# Altium PCB PCB1.PcbDoc (part 1 of 3)
Units mm, origin at the board's own origin, x right, y up, seen from the top; angles counter-clockwise.
Board outline 80 x 55 mm, 4 copper layers (Top Layer, Inner Layer 1, Inner Layer 2, Bottom Layer 1), stack 0.603 mm thick; 136 components, 94 nets, 499 pads, 245 vias.
Unrouted connection lines stored in the file: 1.
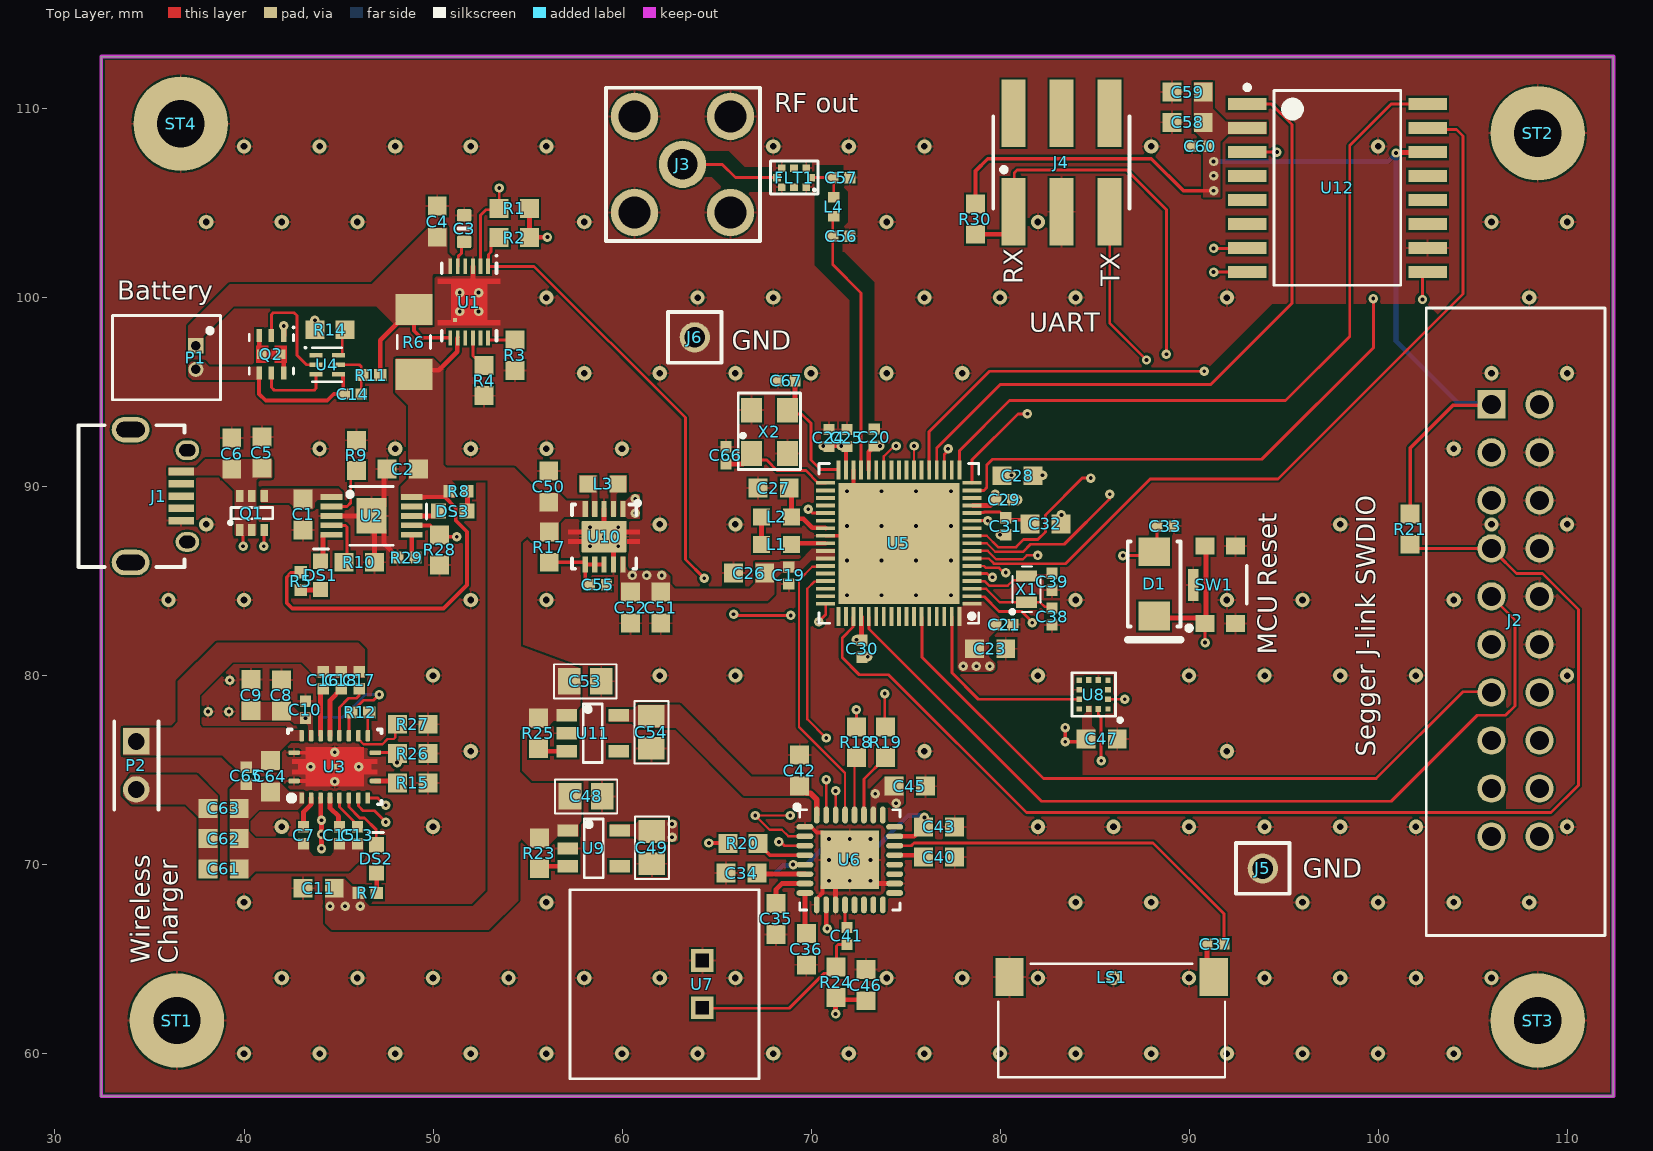
[diagram p0: Top Layer view]
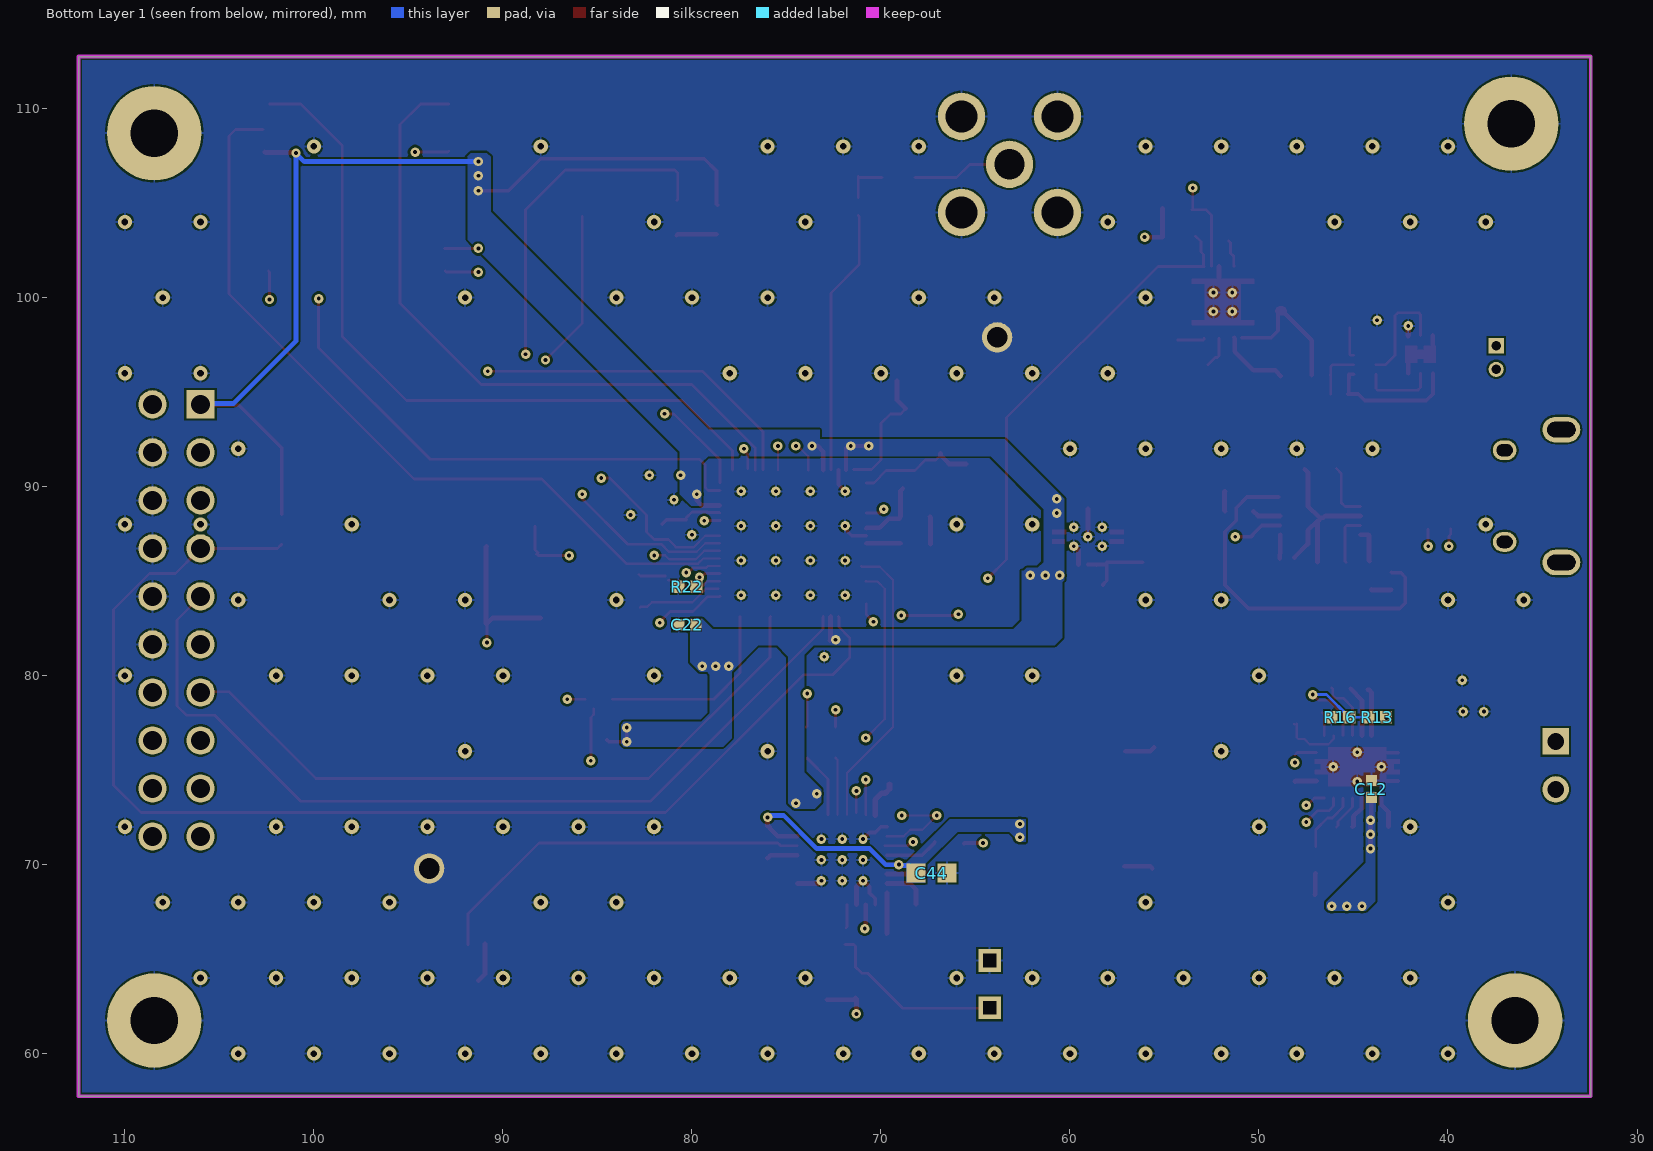
[diagram p1: Bottom Layer 1 view, seen from below]
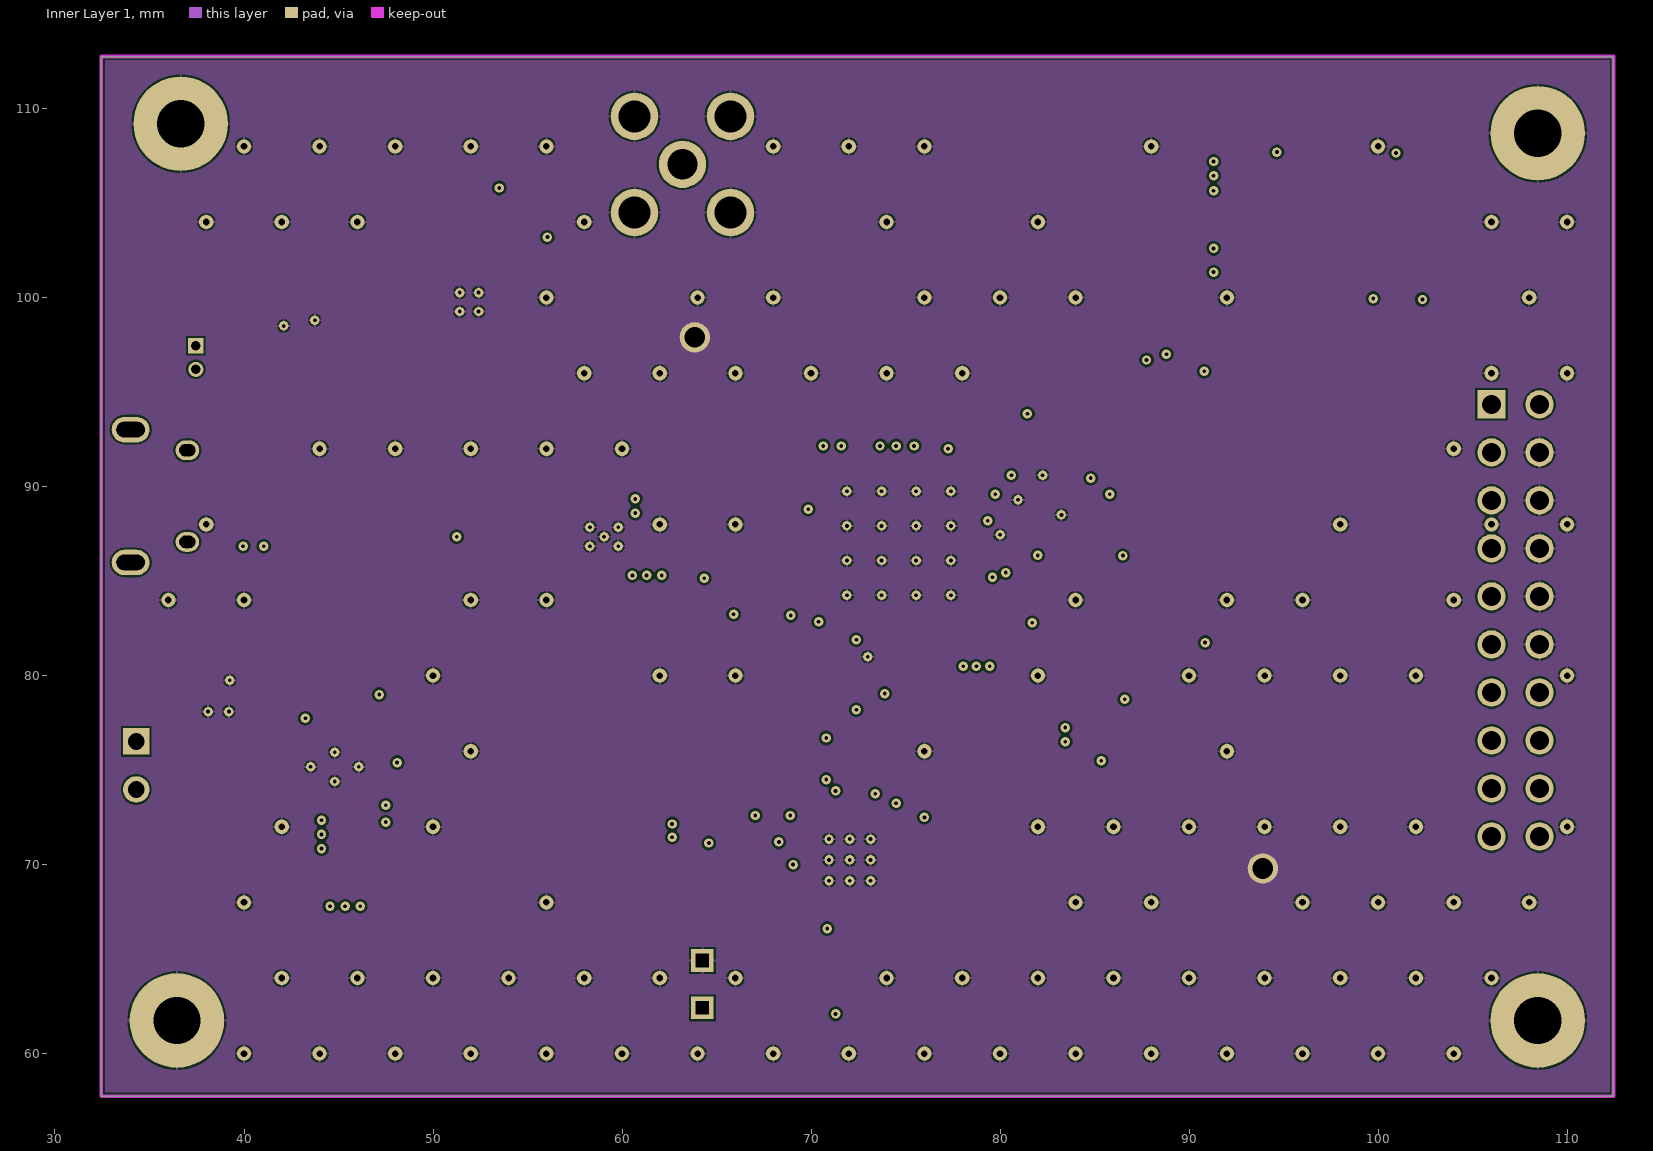
[diagram p2: Inner Layer 1]
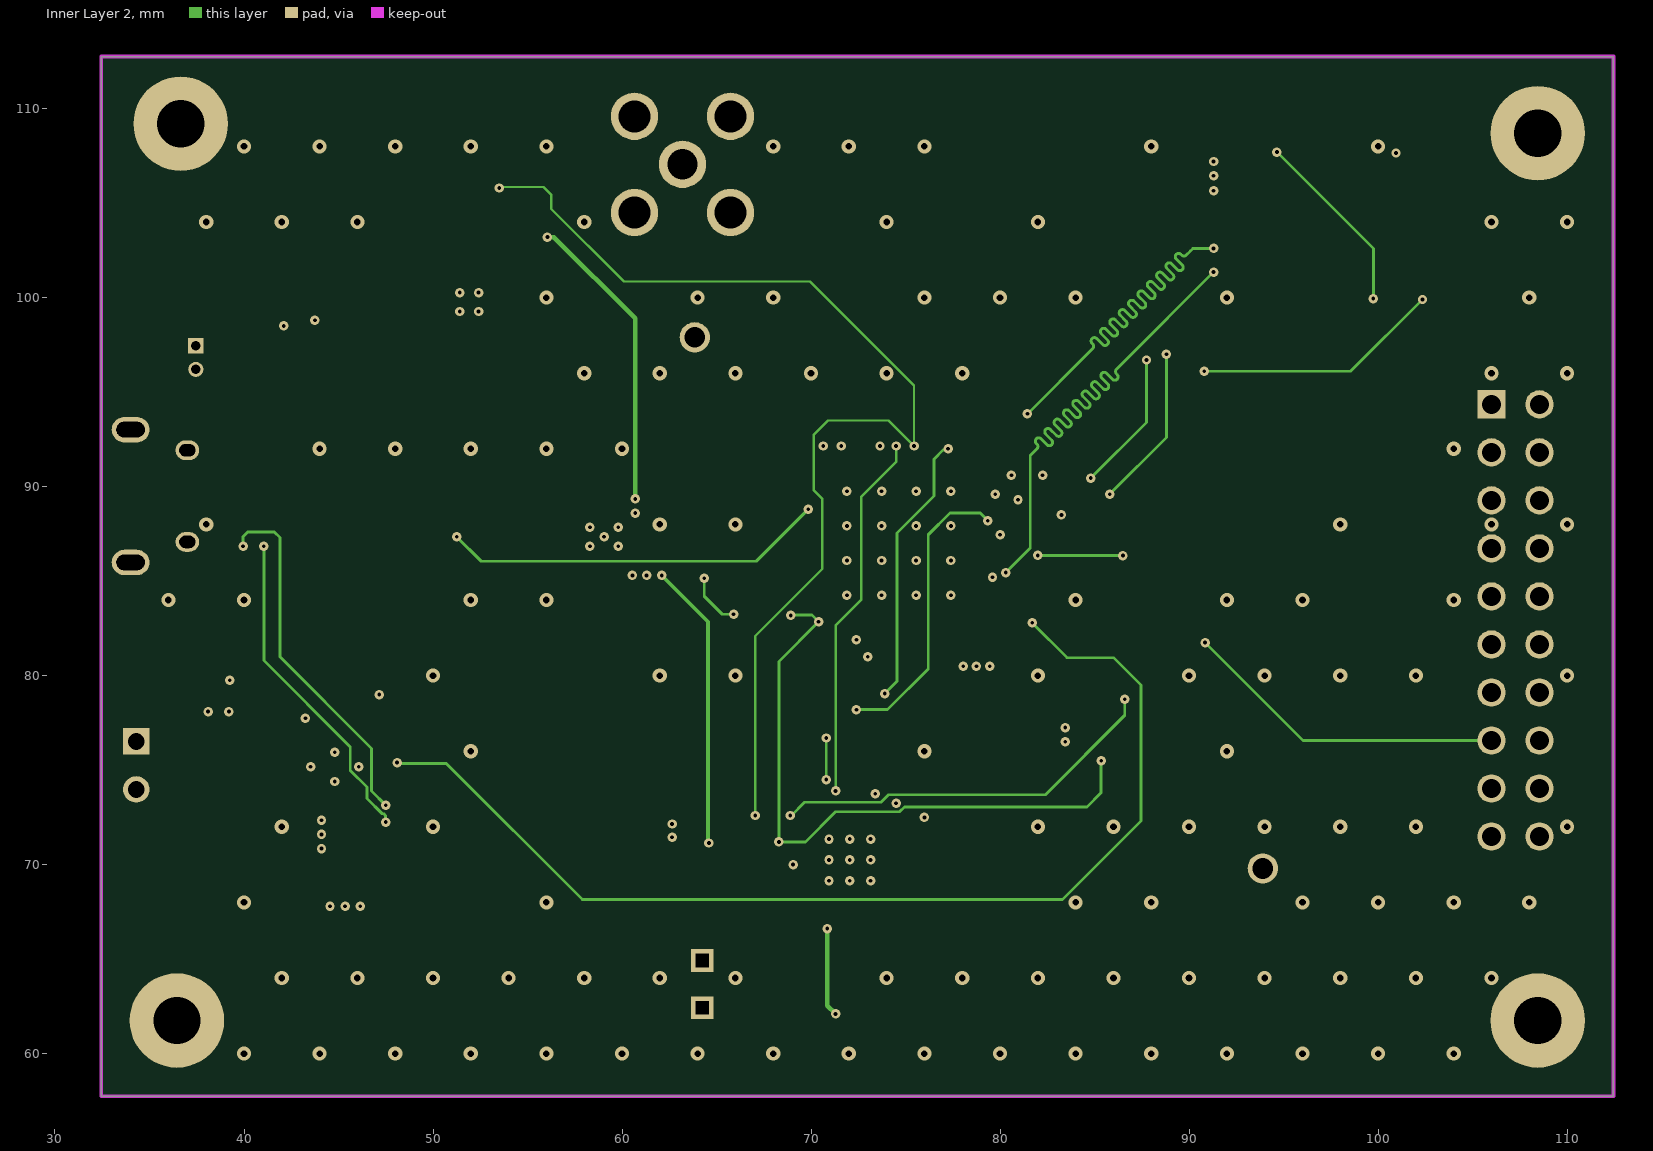
[diagram p3: Inner Layer 2]

## Layer stack, top to bottom
Top Solder: solder mask 0.0102, Solder Resist, Dk 3.5
Top Layer: signal copper 0.035
Dielectric 2: prepreg 0.0711, PP-006, Dk 4.1
Inner Layer 1: signal copper 0.0356
Dielectric 1: dielectric 0.32, FR-4, Dk 4.8
Inner Layer 2: signal copper 0.0356
Dielectric 3: prepreg 0.0711, PP-006, Dk 4.1
Bottom Layer 1: signal copper 0.035
Bottom Solder: solder mask 0.0102, Solder Resist, Dk 3.5

## Board outline
32.45,57.75 32.45,112.75 112.45,112.75 112.45,57.75

## Design rules (kind name [scope] priority, off if disabled: settings)
BoardOutlineClearance [All] p1: gap=0.2 ignorepadtopadclearanceinfootprint=FALSE
Clearance [All] p1: gap=0.1 ignorepadtopadclearanceinfootprint=FALSE except(0.125: Arc-Via Track-Via SMDPad-Via THPad-Via Via-Via Via-Fill Via-Poly Via-Region Via-Text; 0.25: Arc-Hole Track-Hole SMDPad-Hole THPad-Hole Via-Hole Fill-Hole Poly-Hole Region-Hole Text-Hole)
ComponentClearance [All] p1: gap=0 collisioncheckmode=3 verticalgap=2540 showdistances=TRUE checkcomponentboundary=TRUE
DiffPairsRouting 100R [InDifferentialPair('DRAM_SDQS0') or InDifferentialPair('DRAM_SDQS1')  or InDifferentialPair('DRAM_SDCLK0')] p1: maxlimit=0.25 minlimit=0.09 mostfreqgap=0.125 toplayer_minwidth=0.09 toplayer_maxwidth=0.125 toplayer_prefwidth=0.1 midlayer1_minwidth=0.09 midlayer1_maxwidth=0.125 midlayer1_prefwidth=0.1 midlayer2_minwidth=0.09 midlayer2_maxwidth=0.125 midlayer2_prefwidth=0.1 bottomlayer_minwidth=0.09 bottomlayer_maxwidth=0.125 bottomlayer_prefwidth=0.1 maxuncoupledlength=20
DiffPairsRouting 90R [InDifferentialPair('USB_D')] p2: maxlimit=0.15 minlimit=0.125 mostfreqgap=0.125 toplayer_minwidth=0.125 toplayer_maxwidth=0.15 toplayer_prefwidth=0.125 midlayer1_minwidth=0.125 midlayer1_maxwidth=0.15 midlayer1_prefwidth=0.125 midlayer2_minwidth=0.125 midlayer2_maxwidth=0.15 midlayer2_prefwidth=0.125 bottomlayer_minwidth=0.125 bottomlayer_maxwidth=0.15 bottomlayer_prefwidth=0.125 maxuncoupledlength=12.7
Height [All] p1: minheight=0 maxheight=1816.048 prefheight=12.7
HoleSize [All] p1: absolutevalues=TRUE maxlimit=6.3 minlimit=0.2 maxpercent=80.000 minpercent=20.000
HoleToHoleClearance [All] p1: gap=0.25 allowstackedmicrovias=FALSE
MatchedLengths QSPI [InNetClass('QSPI')] p1: tolerance=10 checknetsindiffpair=FALSE checkdiffpairvsdiffpair=TRUE checkxsignals=TRUE checkothers=TRUE
MinimumAnnularRing [All] p1: minimumring=0.076
MinimumSolderMaskSliver [All] p1: minsoldermaskwidth=0
PlaneClearance [All] p1: clearance=0.1
PlaneConnect PlaneConnectPowerPads [InPadClass('PowerPads')] p1: planeconnectstyle=Direct reliefexpansion=0.508 reliefentries=4 reliefconductorwidth=0.254 reliefairgap=0.254
PlaneConnect [All] p2: planeconnectstyle=Direct reliefexpansion=0.3 reliefentries=4 reliefconductorwidth=0.1 reliefairgap=0.1
PolygonConnect GND_POLY [InNet('GND')] p1: connectstyle=Relief reliefconductorwidth=0.125 reliefentries=4 polygonreliefangle="90 Angle" airgapwidth=0.1
PolygonConnect PolygonConnect_1 [All] p2: connectstyle=Direct reliefconductorwidth=0.254 reliefentries=4 polygonreliefangle="90 Angle" airgapwidth=0.254
PolygonConnect PolygonConnectPowerPads [All vs (InPadClass('PowerPads'))] p3: connectstyle=Direct reliefconductorwidth=0.254 reliefentries=4 polygonreliefangle="90 Angle" airgapwidth=0.254
RoomDefinition Sheet2 [InComponentClass('Sheet2')] p1: confinementstyle=ConfineOut formatcopy=TRUE lockcomponents=FALSE outline 119.25,132.55 148.3,103.5 196.2,103.5 213.35,120.65 177.35,156.65 175.25,156.65
RoomDefinition Sheet1 [InComponentClass('Sheet1')] p2: confinementstyle=ConfineOut formatcopy=TRUE lockcomponents=FALSE outline 129,144 129,132.8 166.65,95.15 208.35,136.85 224.6,136.85 190.5,170.95
RoutingTopology RoutingTopology_DDRAddressAndControls [InNetClass('DDR_AddressAndControls')] p1: topology=Daisy_Simple
RoutingTopology [All] p2: topology=Shortest
RoutingVias [All] p1: holewidth=0.2 width=0.5 viastyle="Through Hole" minholewidth=0.2 minwidth=0.45 maxholewidth=6.3 maxwidth=6.55
SilkToSilkClearance [All] p1: silktosilkclearance=0
SilkToSolderMaskClearance [IsPad] p1: minsilkscreentomaskgap=0.102 clearancetoexposedcopper=TRUE
SolderMaskExpansion [All] p1: expansion=0.075 istentingtop=FALSE
Width Width_1 [TouchesRoom('RoomDefinition') and (not OnTopLayer)] p1: maxlimit=0.65 minlimit=0.1 preferedwidth=0.125 toplayer_prefwidth=0.1 midlayer1_minwidth=0.125 midlayer2_minwidth=0.125 bottomlayer_prefwidth=0.1 minimp=50.000000 maximp=50.000000 favimp=50.000000
Width 50R [(InNetClass('QSPI') or InNetClass('DDR_DB0') or InNetClass('DDR_DB1')) and not(InAnyDifferentialPair) or InNetClass('ENET') or InNetClass('SD')  or InNet('BL_RF')] p2: maxlimit=0.15 minlimit=0.1 preferedwidth=0.15 midlayer1_minwidth=0.125 midlayer2_minwidth=0.125 minimp=50.000000 maximp=50.000000 favimp=50.000000
Width [All] p3: maxlimit=0.65 minlimit=0.1 preferedwidth=0.125 midlayer1_minwidth=0.125 midlayer2_minwidth=0.125 minimp=50.000000 maximp=50.000000 favimp=50.000000
19 further rules are at their usual default settings.

## Classes and differential pairs
net class QSPI: QSPI_IO0 QSPI_IO1 QSPI_IO2 QSPI_IO3 QSPI_NCS QSPI_SCK
component class Sheet2: C33 C34 C35 C36 C37 C38 C39 C40 C41 C42 C43 C44 C45 C46 C47 C48 C49 C53 C54 C56 C57 C58 C59 C60 C66 C67 D1 FLT1 J2 J3 J4 J5 J6 L4 LS1 R18 R19 R20 R21 R22 R23 R24 R25 R30 SW1 U5 U6 U7 U8 U9 U11 U12 X1 X2
component class sheet1: C1 C2 C3 C4 C5 C6 C7 C8 C9 C10 C11 C12 C13 C14 C15 C16 C17 C18 C19 C20 C21 C22 C23 C24 C25 C26 C27 C28 C29 C30 C31 C32 C50 C51 C52 C55 C61 C62 C63 C64 C65 DS1 DS2 DS3 J1 L1 L2 L3 P1 P2 Q1 Q2 R1 R2 R3 R4 R5 R6 R7 R8 R9 R10 R11 R12 R13 R14 R15 R16 R17 R26 R27 R28 R29 ST1 ST2 ST3 ST4 U1 U2 U3 U4 U10

## Components (designator, comment, footprint, x,y, rotation, side; value= is the part's Value field where it differs from the comment)
C1 "C0603C105K3PACTU" 0603-SMD-CAP 43.125,88.5 r270 top value=1uF
C2 "C0603C105K3PACTU" 0603-SMD-CAP 48.375,90.925 r180 top value=1uF
C3 "Capacitor 470nF +/-20% 25V 0603" CAPC0603(1608)100_L 51.65,103.65 r90 top value=470nF
C4 "C0603C105K3PACTU" 0603-SMD-CAP 50.225,104.046 r90 top value=1uF
C5 "0603ZD106KAT2A" 0603-SMD-CAP 40.95,91.775 r270 top value=10µF
C6 "C0603C105K3PACTU" 0603-SMD-CAP 39.35,91.775 r90 top value=1uF
C7 "CL05B103KB5NNNC" 0402-SMD-CAP 43.15,71.55 r90 top value=10nF
C8 "0603ZD106KAT2A" 0603-SMD-CAP 41.975,78.925 r270 top value=10µF
C9 "0603ZD106KAT2A" 0603-SMD-CAP 40.374,78.95 r270 top value=10µF
C10 "EMF105B7104MVHF" 0402-SMD-CAP 43.25,78.2 r90 top value=100nF
C11 "C0603C105K3PACTU" 0603-SMD-CAP 43.925,68.75 r180 top value=1uF
C12 "EMF105B7104MVHF" 0402-SMD-CAP 44.05,74 r90 bottom value=100nF
C13 "CC0402KRX7R8BB223" 0402-SMD-CAP 46.001,71.55 r90 top value=22nF
C14 "EMF105B7104MVHF" 0402-SMD-CAP 45.75,94.9 r180 top value=100nF
C15 "C1005X5R1E474K050BB" 0402-SMD-CAP 45.051,71.55 r90 top value=470nF
C16 "CL05B103KB5NNNC" 0402-SMD-CAP 44.2,79.75 r270 top value=10nF
C17 "CC0402KRX7R8BB223" 0402-SMD-CAP 46.101,79.75 r270 top value=22nF
C18 "C1005X5R1E474K050BB" 0402-SMD-CAP 45.151,79.75 r270 top value=470nF
C19 "EMF105B7104MVHF" 0402-SMD-CAP 68.825,85.3 r270 top value=100nF
C20 "EMF105B7104MVHF" 0402-SMD-CAP 73.35,92.6 r90 top value=100nF
C21 "EMF105B7104MVHF" 0402-SMD-CAP 80.225,82.7 r0 top value=100nF
C22 "EMF105B7104MVHF" 0402-SMD-CAP 80.25,82.7 r0 bottom value=100nF
C23 "C0603C475K9PACTU" 0603-SMD-CAP 79.5,81.424 r0 top value=4.7uF
C24 "EMF105B7104MVHF" 0402-SMD-CAP 70.95,92.575 r90 top value=100nF
C25 "04025A101JAT2A" 0402-SMD-CAP 71.9,92.575 r90 top value=100pF
C26 "C0603C475K9PACTU" 0603-SMD-CAP 66.7,85.425 r180 top value=4.7uF
C27 "C0603C475K9PACTU" 0603-SMD-CAP 68,89.926 r180 top value=4.7uF
C28 "C0603C105K3PACTU" 0603-SMD-CAP 80.95,90.575 r0 top value=1uF
C29 "CC0402KRX7R7BB103" 0402-SMD-CAP 80.225,89.3 r0 top value=10nF
C30 "EMF105B7104MVHF" 0402-SMD-CAP 72.7,81.425 r270 top value=100nF
C31 "EMF105B7104MVHF" 0402-SMD-CAP 80.3,87.9 r270 top value=100nF
C32 "C0603C105K3PACTU" 0603-SMD-CAP 82.425,88.025 r0 top value=1uF
C33 "EMF105B7104MVHF" 0402-SMD-CAP 88.75,87.91 r0 top value=100nF
C34 "GRM188R71A225KE15D" 0603-SMD-CAP 66.3,69.55 r180 top value=2.2uF
C35 "C0603C105K3PACTU" 0603-SMD-CAP 68.15,67.1 r270 top value=1uF
C36 "C0603C105K3PACTU" 0603-SMD-CAP 69.75,65.5 r270 top value=1uF
C37 "GRM155R71C224KA12D" 0402-SMD-CAP 91.4,65.8 r180 top value=220nF
C38 "04025A7R0CAT2A" 0402-SMD-CAP 82.75,83.125 r90 top value=7pF
C39 "04025A7R0CAT2A" 0402-SMD-CAP 82.75,84.975 r90 top value=7pF
C40 "C0603C105K3PACTU" 0603-SMD-CAP 76.8,70.4 r0 top value=1uF
C41 "GRM155R71C224KA12D" 0402-SMD-CAP 71.9,66.225 r90 top value=220nF
C42 "C0603C105K3PACTU" 0603-SMD-CAP 69.4,75 r90 top value=1uF
C43 "C0603C105K3PACTU" 0603-SMD-CAP 76.8,72 r0 top value=1uF
C44 "C0603C105K3PACTU" 0603-SMD-CAP 67.3,69.549 r180 bottom value=1uF
C45 "C0603C105K3PACTU" 0603-SMD-CAP 75.25,74.15 r0 top value=1uF
C46 "C0603C105K3PACTU" 0603-SMD-CAP 72.901,63.649 r90 top value=1uF
C47 "C0603C105K3PACTU" 0603-SMD-CAP 85.4,76.65 r0 top value=1uF
C48 "C0805C106K8PACTU" 0805-SMD-CAP 58.1,73.609 r0 top value=10uF
C49 "C0805C106K8PACTU" 0805-SMD-CAP 61.579,70.9 r270 top value=10uF
C50 "0603ZD106KAT2A" 0603-SMD-CAP 56.125,89.975 r270 top value=10µF
C51 "0603ZD106KAT2A" 0603-SMD-CAP 62.05,83.625 r90 top value=10µF
C52 "0603ZD106KAT2A" 0603-SMD-CAP 60.45,83.625 r90 top value=10µF
C53 "C0805C106K8PACTU" 0805-SMD-CAP 58.05,79.7 r0 top value=10uF
C54 "C0805C106K8PACTU" 0805-SMD-CAP 61.55,77 r270 top value=10uF
C55 "EMF105B7104MVHF" 0402-SMD-CAP 58.725,84.8 r0 top value=100nF
C56 "GJM1555C1HR80BB01D" 0402-SMD-CAP 71.6,103.25 r0 top value=0.8pF
C57 "GJM1555C1HR30WB01D" 0402-SMD-CAP 71.6,106.35 r0 top value=0.3pF
C58 "CC0603KRX7R9BB104" 0603-SMD-CAP 89.9,109.275 r180 top value=100nF
C59 "CC0603KRX7R9BB104" 0603-SMD-CAP 89.9,110.876 r180 top value=100nF
C60 "04025A101JAT2A" 0402-SMD-CAP 90.6,108 r180 top value=100pF
C61 "06035C683KAT2A" 0603-SMD-CAP 38.95,69.775 r0 top value=68nF
C62 "06035C683KAT2A" 0603-SMD-CAP 38.95,71.375 r0 top value=68nF
C63 "06035G473ZAT2A" 0603-SMD-CAP 38.95,72.975 r0 top value=47nF
C64 "06031C182JAT2A" 0603-SMD-CAP 41.4,74.7 r90 top value=1.8nF
C65 "04025A101JAT2A" 0402-SMD-CAP 40.125,74.7 r90 top value=100pF
C66 "CGA2B2C0G1H080D050BA" 0402-SMD-CAP 65.5,91.651 r90 top value=8pF
C67 "CGA2B2C0G1H080D050BA" 0402-SMD-CAP 68.7,95.601 r180 top value=8pF
D1 "SS12-E3/61T" VISH-DO-214AC_V 88.154,84.85 r270 top
DS1 "LTST-C190GKT" LTST-C190GKT_V 44.049,85.303 r90 top
DS2 "LTST-C190KSKT" LTST-C190KSKT_V 47.001,70.3 r90 top
DS3 "LTST-C190KSKT" LTST-C190KSKT_V 51.047,88.7 r180 top
FLT1 "LFL212G45TC1A007" LFL212G45TC1A007-Footprint-1 69.1,106.35 r180 top
J1 "ZX62D-B-5P8" HIRO-ZX62D-B-5P8_V 35.5,89.5 r270 top
J2 "51033085" 51033085-Footprint-1 107.25,82.9 r90 top
J3 "142-0701-501" 142-0701-501-Footprint-1 63.2,107.05 r0 top
J4 "5-146130-2" TECO-5-146130-2_V 83.25,107.15 r0 top
J5 "61300111121" 61300111121 93.9,69.8 r0 top
J6 "61300111121" 61300111121 63.85,97.9 r0 top
L1 "B82496C3100J000" 0603-SMD-IND 68.175,86.95 r0 top value=10nH
L2 "CVH160808-2R2M" 0603-SMD-IND 68.175,88.4 r180 top value=2.2uH
L3 "B82496C3229A" 0603-SMD-IND 59,90.15 r0 top value=2.2nH
L4 "LQG15HS2N7S02D" 0402-SMD-IND 71.2,104.8 r90 top value=2.7nH
LS1 "CMR-12062S-67" CMR-12062S-67-Footprint-1 85.9,61.75 r180 top
P1 "53048-0210" PHOE-1803277_V 37.45,96.85 r270 top
P2 "5-146280-2" TECO-5-146280-2_V 34.3,75.25 r270 top
Q1 "SI1441EDH-T1-GE3" SOT23127P600-8N#1 40.418,88.6 r90 top
Q2 "CSD85301Q2" SON65P200X80_HS-7N 41.45,97 r270 top
R1 "ERJ-3EKF4701V" 0603-SMD-RES 54.3,104.721 r0 top value=4.7k
R2 "ERJ-3EKF4701V" 0603-SMD-RES 54.3,103.171 r0 top value=4.7k
R3 "CR0603-JW-105ELF" 0603-SMD-RES 54.336,96.95 r270 top value=1M
R4 "CR0603-JW-105ELF" 0603-SMD-RES 52.7,95.611 r270 top value=1M
R5 "ERJ-2RKF4220X" 0402_SMD_RES 42.999,85 r270 top value=422
R6 "WSLP1206R0200FEA" Chip2PinSM127P600-8N 48.985,97.65 r270 top value=20m
R7 "ERJ-2RKF4220X" 0402_SMD_RES 46.55,68.499 r180 top value=422
R8 "ERJ-2RKF4220X" 0402_SMD_RES 51.35,89.751 r180 top value=422
R9 "CRCW06031K10FKEA" 0603-SMD-RES 45.95,91.65 r270 top value=1.1k
R10 "ERJ-3EKF2401V" 0603-SMD-RES 46.1,86 r180 top value=2.4k
R11 "CRCW0402200RFKED" 0402_SMD_RES 46.735,95.9 r0 top value=200
R12 "ERJ-2RKF4220X" 0402_SMD_RES 46.15,78.05 r180 top value=422
R13 "CRCW040220K0FKED" 0402_SMD_RES 43.75,77.8 r180 bottom value=20k
R14 "CRCW060322K0FKEA" 0603-SMD-RES 44.55,98.3 r0 top value=22k
R15 "ERJ-3EKF2401V" 0603-SMD-RES 48.925,74.325 r180 top value=2.4k
R16 "CRCW0402200RFKED" 0402_SMD_RES 45.7,77.8 r180 bottom value=200
R17 "CRCW0603100RFKEA" 0603-SMD-RES 56.15,86.8 r90 top value=100
R18 "Jumper 0603" 0603-SMD-RES 72.4,76.475 r270 top value=0
R19 "Jumper 0603" 0603-SMD-RES 73.95,76.476 r90 top value=0
R20 "ERJ-3EKF4701V" 0603-SMD-RES 66.4,71.126 r180 top value=4.7k
R21 "Resistor 100k +/-1% 0603 100 mW" 0603-SMD-RES 101.7,87.75 r90 top value=100k
R22 "CRCW040210K0FKTD" 0402_SMD_RES 80.25,84.7 r180 bottom value=10k
R23 "Jumper 0603" 0603-SMD-RES 55.628,70.6 r270 top value=0
R24 "CRCW06032K20FKEA" 0603-SMD-RES 71.325,63.774 r270 top value=2.2k
R25 "Jumper 0603" 0603-SMD-RES 55.575,76.95 r270 top value=0
R26 "ERJ-3EKF4701V" 0603-SMD-RES 48.925,75.875 r180 top value=4.7k
R27 "CRCW060320K0FKEA" 0603-SMD-RES 48.925,77.425 r180 top value=20k
R28 "ERJ-3EKF4701V" 0603-SMD-RES 50.35,86.65 r90 top value=4.7k
R29 "CRCW040210K0FKTD" 0402_SMD_RES 48.6,86.25 r180 top value=10k
R30 "CRCW060322K0FKEA" 0603-SMD-RES 78.7,104.15 r270 top value=22k
ST1 "PTH-M2D5X5" PTH-M2D5X5 36.45,61.75 r0 top
ST2 "PTH-M2D5X5" PTH-M2D5X5 108.45,108.7 r0 top
ST3 "PTH-M2D5X5" PTH-M2D5X5 108.45,61.75 r0 top
ST4 "PTH-M2D5X5" PTH-M2D5X5 36.65,109.2 r0 top
SW1 "KMR231GLFS" FP-KMR231GLFS-MFG 91.65,84.8 r90 top
U1 "BQ27411DRZT-G1A" SON40P400X100_HS-13N 51.911,99.766 r270 top
U2 "BQ24092DGQT" TSSOP50P490X110_HS-11L 46.75,88.45 r0 top
U3 "BQ51051BRHLR" RHL0020A_V 44.8,75.175 r90 top
U4 "BQ29707DSER" SON50P150X80-6N 44.4,96.45 r0 top
U5 "STM32WB55RCV6" QFN40P800X800X100_HS-69N 74.65,87 r180 top
U6 "MAX9867ETJ+G3U" QFN50P500X500X80_HS-33N 72.05,70.25 r0 top
U7 "AOM-4544P-2-R" AOM-4544P-2-R-Footprint-1 62.25,63.675 r270 top
U8 "MC3413" "MC3413 -Footprint-1" 84.95,79 r90 top
U9 "TPS78418QDBVRQ1" SOT23127P600-8N#2 58.504,70.859 r0 top
U10 "TPS63001DRCR" DRC0010J_V 59.05,87.35 r270 top
U11 "TPS78418QDBVRQ1" SOT23127P600-8N#2 58.45,76.95 r0 top
U12 "S25FL128SDSMFV000" SOIC127P1030X265-16M 97.85,105.8 r0 top
X1 "ECS-.327-7-12-TR" ECS-.327-7-12-TR-Footprint-1 81.4,84.575 r90 top
X2 "ECS-320-8-33B-7KM-TR" ECS-320-8-33B-7KM-TR-Footprint-1 67.8,92.901 r90 top

## Footprints (in the part's own frame and the unit in brackets; to place one, negate y for a bottom-side part, rotate by r counter-clockwise, add the part's x,y. Pads: shape width x height; smd on the part's side, far side on the other; paste and mask are expansions set on the pad)
142-0701-501-Footprint-1 [mm]
  round 2.5 hole 1.6: 1(0,0)
  round 2.5 hole 1.7: 2(-2.54,2.54) 3(2.54,2.54) 4(2.54,-2.55) 5(-2.54,-2.55)
  silkscreen extent -4.05,-4.05 4.1,4.05
0402-SMD-CAP [mm] "Passive 0402 SMD footprint"
  rect 0.6x0.6 smd paste+0 mask+0: 1(-0.45,0) 2(0.45,0)
  body extent -0.8,-0.4 0.8,0.4, height 0.25
0402-SMD-IND [mm]
  rect 0.55x0.63 smd: 1(-0.5,0) 2(0.5,0)
  body extent -0.55,-0.25 0.55,0.26, height 0.51
0402_SMD_RES [mm] "SMD 0402 package resistor"
  rect 0.65x0.65 smd mask+0.06: 1(-0.475,0) 2(0.475,0)
  body extent -0.53,-0.27 0.53,0.28, height 0.34
0603-SMD-CAP [mm] "0402 package SMD passive footprint"
  rect 1x1 smd paste+0 mask+0.06: 1(-0.85,0) 2(0.8,0)
0603-SMD-IND [mm] "Chip Inductor, 2-Leads, Body 1,60x0,80mm, IPC High Density"
  rect 0.9x0.9 smd mask+0.06: 1(-0.79,0) 2(0.79,0)
  body extent -0.88,-0.48 0.87,0.48, height 0.95
0603-SMD-RES [mm]
  rect 1x1 smd mask+0.06: 1(-0.8,0) 2(0.8,0)
  body extent -0.77,-0.48 0.77,0.48, height 0.5
0805-SMD-CAP [mm] "SMD 0805 package capacitor"
  rect 1.2x1.4 smd mask+0.06: 1(-0.85,0) 2(0.85,0)
  silkscreen extent -1.65,-0.9 1.65,0.9, body extent -1.05,-0.63 1.05,0.63, height 1.26
51033085-Footprint-1 [mm]
  rect 1.5x1.5 hole 1: 1(11.45,1.25)
  round 1.5 hole 1: 2(11.45,-1.29) 3(8.91,1.25) 4(8.91,-1.29) 5(6.37,1.25) 6(6.37,-1.29) 7(3.83,1.25) 8(3.83,-1.29) 9(1.29,1.25) 10(1.29,-1.29) 11(-1.25,1.25) 12(-1.25,-1.29) 13(-3.79,1.25) 14(-3.79,-1.29) 15(-6.33,1.25) 16(-6.33,-1.29) 17(-8.87,1.25) 18(-8.87,-1.29) 19(-11.41,1.25) 20(-11.41,-1.29)
  silkscreen extent -16.65,-4.75 16.55,4.7
61300111121 [mm] "Pin Header, pitch 2.54 mm, THT, Vertical, single row, 1p"
  round 1.6 hole 1.1: 1(0,0)
  silkscreen extent -1.42,-1.35 1.42,1.35, body extent -1.27,-1.27 1.27,1.27, height 8.57
AOM-4544P-2-R-Footprint-1 [mm]
  rect 1.2x1.2 hole 0.7 square mask+0.1: 1(1.25,2) 2(-1.25,2)
  silkscreen extent -5,-5 5,5, body extent -4.85,-4.85 4.85,4.85, height 2.67
CAPC0603(1608)100_L [mm] "Chip Capacitor, Body 1.6x0.8mm, Height 1.0mm, IPC High Density"
  rrect25% 0.66x0.76 smd: 1(-0.7,0) 2(0.7,0)
  silkscreen extent 0,-0.3 0,0.3, body extent -0.8,-0.4 0.8,0.4, height 0.95
Chip2PinSM127P600-8N [mm] "1206-SMD-RES"
  rect 1.65x1.95 smd: 1(-1.725,0) 2(1.725,0)
  silkscreen extent -0.35,-0.87 0.35,0.87, body extent -1.73,-0.92 1.73,0.92, height 0.89
CMR-12062S-67-Footprint-1 [mm]
  rect 1.5x2 smd mask+0.1: 1(-5.4,-2.3) 2(5.4,-2.3)
  silkscreen extent -6,-3 6,3
DRC0010J_V [mm] "SON, 10-Leads, Body 3x3mm, Pitch 0.5mm, Thermal Pad 2.4x1.65mm, TI Recommended"
  rect 0.85x0.28 smd paste-0.025 mask+0.07: 1(-1.475,1) 2(-1.475,0.5) 3(-1.475,0) 4(-1.475,-0.5) 5(-1.475,-1) 6(1.475,-1) 7(1.475,-0.5) 8(1.475,0) 9(1.475,0.5) 10(1.475,1)
  rrect6% 1.65x2.4 smd paste-0.825 mask+0.07: 11(0,0)
  Top Layer region: -0.39,1.143 -0.11,1.143 -0.11,1.9 -0.39,1.9
  Top Layer region: 0.39,1.9 0.11,1.9 0.11,1.2 0.39,1.2
  Top Layer region: 0.39,-1.143 0.11,-1.143 0.11,-1.9 0.39,-1.9
  Top Layer region: -0.39,-1.9 -0.11,-1.9 -0.11,-1.143 -0.39,-1.143
  silkscreen extent -1.88,-1.7 1.7,1.88, body extent -1.55,-1.55 1.55,1.55, height 1
ECS-320-8-33B-7KM-TR-Footprint-1 [mm]
  rect 1.3x1.1 smd mask+0.1: 1(-1.15,0.95) 2(1.15,0.95) 3(1.15,-0.95) 4(-1.15,-0.95)
  silkscreen extent -2,-1.65 2.05,1.65, body extent -1.6,-1.25 1.6,1.25, height 0.8
ECS-.327-7-12-TR-Footprint-1 [mm]
  rect 0.6x1.1 smd mask+0.1: 1(-0.7,0) 2(0.7,0)
  silkscreen extent -1.3,-0.75 1.2,0.85, body extent -1,-0.6 1,0.6, height 0.6
FP-KMR231GLFS-MFG [mm]
  rect 0.9x1 smd paste+0 mask+0.1: 1(-2.05,0.8) 2(2.05,0.8) 3(-2.05,-0.8) 4(2.05,-0.8)
  rect 1.7x0.55 smd paste+0 mask+0.1: 5(0,1.425)
  silkscreen extent -2.41,-1.4 1,1.78
HIRO-ZX62D-B-5P8_V [mm] "Micro-USB Connector, 9-Leads, Body 7.5x5.6mm, Pitch 0.65mm"
  rect 0.4x1.35 smd: 1(-1.3,1.175) 2(-0.65,1.175) 3(0,1.175) 4(0.65,1.175) 5(1.3,1.175)
  oval 1.05x1.25 hole 0.65 slot 0.85 at 90 deg: 6(-2.425,1.5) 7(2.425,1.5)
  oval 1.35x2 hole 0.825 slot 1.5 at 90 deg: 8(-3.512,-1.5) 9(3.512,-1.5)
  silkscreen extent -3.75,-4.25 3.75,1.35, body extent -4.05,-4.15 4.05,1.65, height 2.75
LFL212G45TC1A007-Footprint-1 [mm]
  rect 0.4x0.4 smd mask+0.05: 1(-0.65,0.5) 2(0,0.5) 3(0.65,0.5) 4(0.9,0) 5(0.65,-0.5) 6(0,-0.5) 7(-0.65,-0.5) 8(-0.9,0)
  silkscreen extent -1.28,-0.87 1.25,0.88
LTST-C190GKT_V [mm] "SMD, 2-Leads, Body 1.6x0.8mm"
  rect 0.8x0.8 smd: 1(-0.75,0) 2(0.75,0)
  silkscreen extent 1.4,-0.42 1.4,0.38, body extent -0.8,-0.4 0.8,0.4, height 0.9
LTST-C190KSKT_V [mm] "SMD, 2-Leads, Body 1.6x0.8mm"
  rect 0.8x0.8 smd: 1(-0.75,0) 2(0.75,0)
  silkscreen extent 1.4,-0.38 1.4,0.42, body extent -0.8,-0.4 0.8,0.4, height 0.9
"MC3413 -Footprint-1" [mm]
  rect 0.28x0.28 smd mask+0.05: 1(-0.763,-0.763) 4(-0.763,0.763) 7(0.763,0.763) 10(0.763,-0.763)
  rect 0.31x0.28 smd mask+0.05: 2(-0.763,-0.25) 3(-0.763,0.25) 8(0.763,0.25) 9(0.763,-0.25)
  rect 0.28x0.31 smd mask+0.05: 5(-0.25,0.763) 6(0.25,0.763) 11(0.25,-0.763) 12(-0.25,-0.763)
  silkscreen extent -1.45,-1.5 1.15,1.15, body extent -1.07,-1.07 1.07,1.07, height 0.92
PHOE-1803277_V [mm] "CONN, Body 9.2x9.01mm, Pitch 3.81mm"
  rect 0.8x0.8 hole 0.5: 1(-0.605,0)
  round 0.8 hole 0.5: 2(0.645,0)
  silkscreen extent -2.2,-4.4 2.25,1.3, body extent -2.1,-4.3 2.15,1.2, height 1.6
PTH-M2D5X5 [mm]
  round 5 hole 2.5: 1(0,0)
QFN40P800X800X100_HS-69N [mm] "QFN, 68-Leads, Body 8,00x8,00mm, Pitch 0,40mm, Thermal Pad 6,40x6,40mm, IPC Medium Density"
  rect 1x0.2 smd mask+0.05: 1(-3.875,3.2) 2(-3.875,2.8) 3(-3.875,2.4) 4(-3.875,2) 5(-3.875,1.6) 6(-3.875,1.2) 7(-3.875,0.8) 8(-3.875,0.4) 9(-3.875,0) 10(-3.875,-0.4) 11(-3.875,-0.8) 12(-3.875,-1.2) 13(-3.875,-1.6) 14(-3.875,-2) 15(-3.875,-2.4) 16(-3.875,-2.8) 17(-3.875,-3.2) 35(3.875,-3.2) 36(3.875,-2.8) 37(3.875,-2.4) 38(3.875,-2) 39(3.875,-1.6) 40(3.875,-1.2) 41(3.875,-0.8) 42(3.875,-0.4) 43(3.875,0) 44(3.875,0.4) 45(3.875,0.8) 46(3.875,1.2) 47(3.875,1.6) 48(3.875,2) 49(3.875,2.4) 50(3.875,2.8) 51(3.875,3.2)
  rect 0.2x1 smd mask+0.05: 18(-3.2,-3.875) 19(-2.8,-3.875) 20(-2.4,-3.875) 21(-2,-3.875) 22(-1.6,-3.875) 23(-1.2,-3.875) 24(-0.8,-3.875) 25(-0.4,-3.875) 26(0,-3.875) 27(0.4,-3.875) 28(0.8,-3.875) 29(1.2,-3.875) 30(1.6,-3.875) 31(2,-3.875) 32(2.4,-3.875) 33(2.8,-3.875) 34(3.2,-3.875) 52(3.2,3.875) 53(2.8,3.875) 54(2.4,3.875) 55(2,3.875) 56(1.6,3.875) 57(1.2,3.875) 58(0.8,3.875) 59(0.4,3.875) 60(0,3.875) 61(-0.4,3.875) 62(-0.8,3.875) 63(-1.2,3.875) 64(-1.6,3.875) 65(-2,3.875) 66(-2.4,3.875) 67(-2.8,3.875) 68(-3.2,3.875)
  rect 6.4x6.4 smd mask+0.05: 69(0,0)
  silkscreen extent -4.23,-4.22 4.22,4.23, body extent -4.08,-4.07 4.07,4.08, height 1
QFN50P500X500X80_HS-33N [mm] "QFN, 32-Leads, Body 5,00x5,00mm, Pitch 0,50mm, Thermal Pad 3,10x3,10mm, IPC Medium Density"
  oval 0.9x0.3 smd: 1(-2.375,1.75) 2(-2.375,1.25) 3(-2.375,0.75) 4(-2.375,0.25) 5(-2.375,-0.25) 6(-2.375,-0.75) 7(-2.375,-1.25) 8(-2.375,-1.75) 17(2.375,-1.75) 18(2.375,-1.25) 19(2.375,-0.75) 20(2.375,-0.25) 21(2.375,0.25) 22(2.375,0.75) 23(2.375,1.25) 24(2.375,1.75)
  oval 0.3x0.9 smd: 9(-1.75,-2.375) 10(-1.25,-2.375) 11(-0.75,-2.375) 12(-0.25,-2.375) 13(0.25,-2.375) 14(0.75,-2.375) 15(1.25,-2.375) 16(1.75,-2.375) 25(1.75,2.375) 26(1.25,2.375) 27(0.75,2.375) 28(0.25,2.375) 29(-0.25,2.375) 30(-0.75,2.375) 31(-1.25,2.375) 32(-1.75,2.375)
  rect 3.1x3.1 smd: 33(0,0)
  silkscreen extent -2.92,-2.65 2.65,2.92, body extent -2.5,-2.5 2.5,2.5, height 0.8
RHL0020A_V [mm] "QFN, 20-Leads, Body 4.5x3.5mm, Pitch 0.5mm, Thermal Pad 3.05x2.05mm, TI Recommended"
  rrect42% 0.24x0.6 smd: 1(-0.75,2.15) 10(-0.75,-2.15) 11(0.75,-2.15) 20(0.75,2.15)
  rrect42% 0.6x0.24 smd: 2(-1.65,1.75) 3(-1.65,1.25) 4(-1.65,0.75) 5(-1.65,0.25) 6(-1.65,-0.25) 7(-1.65,-0.75) 8(-1.65,-1.25) 9(-1.65,-1.75) 12(1.65,-1.75) 13(1.65,-1.25) 14(1.65,-0.75) 15(1.65,-0.25) 16(1.65,0.25) 17(1.65,0.75) 18(1.65,1.25) 19(1.65,1.75)
  rrect33% 0.3x0.3 smd paste-0.15 mask+0: 21(0,0)
  Top Layer region: 0.16,2.25 0.16,1.925 -0.16,1.925 -0.16,2.25 -0.39,2.25 -0.39,1.525 -1.025,1.525 -1.025,-1.525 -0.39,-1.525 -0.39,-2.25 -0.16,-2.25 -0.16,-1.925 0.16,-1.925 0.16,-2.25 0.39,-2.25 0.39,-1.525 1.025,-1.525 1.025,1.525 0.39,1.525 0.39,2.25
  silkscreen extent -1.98,-2.47 1.98,2.47, body extent -1.82,-2.33 1.83,2.32, height 1.01
SOIC127P1030X265-16M [mm] "SOIC, 16-Leads, Body 10,30x7,50mm, Pitch 1,27mm, IPC Low Density"
  rect 2.05x0.65 smd: 1(-4.775,4.445) 2(-4.775,3.175) 3(-4.775,1.905) 4(-4.775,0.635) 5(-4.775,-0.635) 6(-4.775,-1.905) 7(-4.775,-3.175) 8(-4.775,-4.445) 9(4.775,-4.445) 10(4.775,-3.175) 11(4.775,-1.905) 12(4.775,-0.635) 13(4.775,0.635) 14(4.775,1.905) 15(4.775,3.175) 16(4.775,4.445)
  silkscreen extent -4.9,-5.15 3.35,5.44, body extent -3.75,-5.15 3.75,5.15, height 2.65
SON40P400X100_HS-13N [mm] "SON, 12-Leads, Body 2,50x3,97mm, Pitch 0,40mm, Thermal Pad 2,50x2,44mm, IPC Medium Density"
  rect 0.8x0.2 smd mask+0.05: 1(-1.895,1) 2(-1.895,0.6) 3(-1.895,0.2) 4(-1.895,-0.2) 5(-1.895,-0.6) 6(-1.895,-1) 7(1.895,-1) 8(1.895,-0.6) 9(1.895,-0.2) 10(1.895,0.2) 11(1.895,0.6) 12(1.895,1)
  rect 0.2x0.2 smd mask+0: 13(0.95,-0.75)
  Top Layer region: -1.225,-1.65 -1.225,1.65 -0.975,1.65 -0.975,0.95 0.975,0.95 0.975,1.65 1.225,1.65 1.225,-1.65 0.975,-1.65 0.975,-0.95 -0.975,-0.95 -0.975,-1.65
  Top Layer region: 0.975,1.6 0.975,1.1 1.225,1.1 1.225,1.6
  Top Layer region: -1.225,1.6 -1.225,1.1 -0.975,1.1 -0.975,1.6
  Top Layer region: -0.975,-1.6 -0.975,-1.1 -1.225,-1.1 -1.225,-1.6
  Top Layer region: 1.225,-1.6 1.225,-1.1 0.975,-1.1 0.975,-1.6
  silkscreen extent -2.5,-1.45 2.05,1.5, body extent -2.05,-1.3 2.05,1.3, height 1
SON50P150X80-6N [mm] "SON, 6-Leads, Body 1,50x1,50mm, Pitch 0,50mm, IPC Medium Density"
  rect 0.7x0.25 smd mask+0.1: 1(-0.595,0.5) 2(-0.595,0) 3(-0.595,-0.5) 4(0.595,-0.5) 5(0.595,0) 6(0.595,0.5)
  silkscreen extent -1.2,-0.9 0.77,0.95, body extent -0.77,-0.78 0.77,0.77, height 0.8
SON65P200X80_HS-7N [mm] "SON, 6-Leads, Body 2,00x2,00mm, Pitch 0,65mm, Thermal Pad 1,05x0,89mm, IPC Medium Density"
  rect 0.7x0.3 smd mask+0.06: 1(-0.995,0.65) 2(-0.995,0) 3(-0.995,-0.65) 4(0.995,-0.65) 5(0.995,0) 6(0.995,0.65)
  rect 0.5x0.5 smd mask+0: 7(0,0.5) 8(0,-0.5)
  Top Layer region: 0.45,0.8 -0.45,0.8 -0.45,0.175 0.45,0.175
  Top Layer region: -0.45,-0.8 0.45,-0.8 0.45,-0.175 -0.45,-0.175
  silkscreen extent -1.47,-1.17 1.05,1.23, body extent -1.05,-1.05 1.05,1.05, height 0.8
SOT23127P600-8N#1 [mm] "SOT236"
  rect 0.65x0.4 smd mask+0.05: 1(-0.9,0.65) 2(-0.9,0) 3(-0.9,-0.65) 4(0.9,-0.65) 5(0.9,0) 6(0.9,0.65)
  silkscreen extent -0.56,-1.1 0.3,1.19, body extent -0.67,-1.1 0.67,1.1, height 1.1
SOT23127P600-8N#2 [mm] "SOT23 package for TPS784-Q1"
  rect 1.1x0.65 smd: 1(-1.375,0.95) 2(-1.375,0) 3(-1.375,-0.95) 4(1.375,-0.95) 5(1.375,0.95)
  silkscreen extent -0.5,-1.55 0.5,1.55, body extent -0.88,-1.52 0.87,1.53, height 1.1
TECO-5-146130-2_V [mm] "Header, 6-Leads, Body 7.21x4.88mm, Pitch 2.54mm"
  rect 1.27x3.56 smd: 1(-2.54,-2.605) 2(-2.54,2.605) 3(0,-2.605) 4(0,2.605) 5(2.54,-2.605) 6(2.54,2.605)
  silkscreen extent -3.6,-2.44 3.6,2.44, body extent -3.61,-3.77 3.61,3.64, height 9.74
TECO-5-146280-2_V [mm] "Connector, 2-Leads, Body 4.67x2.34mm, Pitch 2.54mm"
  rect 1.4x1.4 hole 0.89: 1(-1.27,0)
  round 1.4 hole 0.89: 2(1.27,0)
  silkscreen extent -2.33,-1.17 2.33,1.17, body extent -2.34,-1.17 2.34,1.17, height 5.33
TSSOP50P490X110_HS-11L [mm] "TSSOP, 10-Leads, Body 3,00x3,00mm, Pitch 0,50mm, Thermal Pad 1,88x1,57mm, IPC High Density"
  rect 1.15x0.3 smd: 1(-2.125,1) 2(-2.125,0.5) 3(-2.125,0) 4(-2.125,-0.5) 5(-2.125,-1) 6(2.125,-1) 7(2.125,-0.5) 8(2.125,0) 9(2.125,0.5) 10(2.125,1)
  rect 1.57x1.88 smd: 11(0,0)
  silkscreen extent -1.27,-1.55 1.15,1.55, body extent -1.55,-1.55 1.55,1.55, height 1.1
VISH-DO-214AC_V [mm] "Molded Diode, 2-Leads, Body 4.5x2.79mm"
  rect 1.52x1.68 smd: 1(-1.7,0) 2(1.7,0)
  silkscreen extent -2.25,-1.4 2.96,1.4, body extent -2.47,-1.4 2.47,1.4, height 2.29

## Part data
C1 C2 C4 C6 C11 C28 C32 C35 C36 C40 C42 C43 C44 C45 C46 C47: library part CMP-001-00097-4, "KEMET - C0603C105K3PACTU - SMD Multilayer Ceramic Capacitor, 1 µF, 25 V, 0603 [1608 Metric], ± 10%, X5R, C Series KEMET", Capacitance=1uF, Case Code (Imperial)=0603, Case Code (Metric)=1608, Dielectric=X5R, Dielectric Material=Ceramic, Max Operating Temperature=85°C, Min Operating Temperature=-55°C, Package Quantity=4000, Tolerance=10%, Voltage=25V, Case/Package=0603, Construction=Flat, Contact Plating=Tin,Matte, Depth=0.8mm, Height=0.8mm, Lead Free="Lead Free", Length=1.6mm, Mfr. Part No.=C0603C105K3PACTU, Mount="Surface Mount,PCB", Number of Pins=2, Packaging="Tape and Reel", Radiation Hardening=No, REACH SVHC="No SVHC", RoHS Compliant=Yes, Series=C0603C, Termination=SMD/SMT, Thickness=0.034inch, Voltage Rating=25V, Voltage Rating (DC)=25V, Width=0.031inch
C3: library part CMP-001-00077-7, "Chip Capacitor, 470nF +/-20%, 25V, 0603, Thickness 1 mm", Case/Package=0603, Max Operating Temperature=85°C, Min Operating Temperature=-55°C, Tolerance=10%, Voltage Rating=25V, Mounting Technology=SMT, Pins=2
C5 C8 C9 C50 C51 C52: library part CMP-001-00075-13, "Chip Capacitor, 10µF +/-20%, 10V, 0603, Thickness 1 mm", Case/Package=0603, Max Operating Temperature=85°C, Min Operating Temperature=-55°C, Tolerance=10%, Voltage Rating=10V, Mfr. Part No.=0603ZD106KAT2A, Mounting Technology=SMT, Pins=2
C7 C16: library part CMP-001-00095-3, "Cap Ceramic 0.01uF 50V X7R 10% SMD 0402 125C Paper T/R", Capacitance=10nF, Case Code (Imperial)=0402, Case Code (Metric)=1005, Dielectric=X7R, Max Operating Temperature=125°C, Min Operating Temperature=-55°C, Package Quantity=1, Tolerance=10%, Voltage=50V, Case/Package=0402, Construction=Flat, Contact Plating=Tin, Depth=0.5mm, Height=0.5mm, Lead Free="Lead Free", Length=1mm, Material=Ceramic, Mount="Surface Mount", Packaging="Tape and Reel", Radiation Hardening=No, RoHS Compliant=Yes, Series=CL, Thickness=0.022inch, Voltage Rating=50V, Voltage Rating (DC)=50V, Width=0.02inch
C10 C12 C14 C19 C20 C21 C22 C24 C30 C31 C33 C55: library part CMP-001-00001-15, "Chip Capacitor, 0.1 uF, +/- 5%, 16 V, 0402 (1005 Metric)", Capacitor Type=Ceramic, Case/Package=0402, Max Operating Temperature=125°C, Min Operating Temperature=-55°C, Tolerance=5%, Voltage Rating=16V, Mfr. Part No.=EMF105B7104MVHF, Mounting Technology=SM, Pins=2, RoHS Compliant=True
C13 C17: library part CMP-001-00098-2, "0402 22 nF 25 V ±10 % Tolerance X7R SMT Multilayer Ceramic Capacitor", Capacitance=22nF, Case Code (Imperial)=0402, Case Code (Metric)=1005, Dielectric=X7R, Max Operating Temperature=125°C, Min Operating Temperature=-55°C, Resistor Type=Ceramic, Tolerance=10%, Voltage Rating=25V, Case/Package=0402, Depth=0.5mm, Halogen Free="Halogen Free", Height=0.5mm, Lead Free="Lead Free", Length=1mm, Mfr. Part No.=CC0402KRX7R8BB223, Mount="Surface Mount", Number of Pins=2, Packaging="Tape and Reel", Radiation Hardening=No, RoHS Compliant=Yes, Series=CC, Termination=SMD/SMT, Thickness=0.022inch, Voltage Rating (DC)=25V, Weight=2.3E-05oz, Width=0.02inch
C15 C18: library part CMP-001-00100-2, "TDK         C1005X5R1E474K050BB            CERAMIC CAPACITOR, 0.47UF, 25V, X5R, 0402", Capacitance=470nF, Case Code (Imperial)=0402, Case Code (Metric)=1005, Dielectric=X5R, Dielectric Material=Ceramic, Max Operating Temperature=85°C, Min Operating Temperature=-55°C, Package Quantity=10000, Tolerance=10%, Voltage=25V, Case/Package=0402, Construction=Flat, Depth=0.5mm, Dissipation Factor=10%, Height=0.5mm, Lead Free="Lead Free", Length=1mm, Mfr. Part No.=C1005X5R1E474K050BB, Mount="Surface Mount", Packaging="Tape and Reel", Radiation Hardening=No, REACH SVHC="No SVHC", Resistor Type=Ceramic, RoHS Compliant=Yes, Series=C, Termination=SMD/SMT, Thickness=500um, Voltage Rating=25V, Voltage Rating (DC)=25V, Weight=2.3E-05oz, Width=0.02inch
C23 C26 C27: library part CMP-001-00092-9, "KEMET - C0603C475K9PACTU - SMD Multilayer Ceramic Capacitor, 4.7 µF, 6.3 V, 0603 [1608 Metric], ± 10%, X5R, C Series KEMET", Capacitance=4.7uF, Case Code (Imperial)=0603, Case Code (Metric)=1608, Dielectric=X5R, Dielectric Material=Ceramic, Max Operating Temperature=85°C, Min Operating Temperature=-55°C, Package Quantity=1, Tolerance=10%, Voltage=6.3V, Case/Package=0603, Construction=Flat, Contact Plating=Tin,Matte, Depth=0.8mm, Dissipation Factor=5%, Height=0.8mm, Lead Free="Lead Free", Lead Pitch=0.7mm, Length=1.6mm, Mount="Surface Mount,PCB", Number of Pins=2, Packaging="Tape and Reel", Radiation Hardening=No, REACH SVHC="No SVHC", RoHS Compliant=Yes, Series=C, Termination=SMD/SMT, Thickness=0.035inch, Voltage Rating=6.3V, Voltage Rating (DC)=6.3V, Width=0.031inch
C25 C60 C65: library part CMP-001-00004-2, "Capacitor, Ceramic; 100pf; Chip; Case 0402; Npo; +/-5%; 50wvdc; Smd; 2.5% Df; Tr", Capacitance=100pF, Case Code (Imperial)=0402, Case Code (Metric)=1005, Dielectric=C0G, Insulation Resistance=1GR, Max Operating Temperature=125°C, Min Operating Temperature=-55°C, Package Quantity=1, Temperature Coefficient=30ppm/°C, Tolerance=5%, Voltage=50V, Case/Package=0402, Construction=Flat, Contact Plating=Tin,Matte, Depth=0.5mm, Dissipation Factor=2.5%, Height=0.56mm, Lead Free="Lead Free", Length=1mm, Mfr. Part No.=04025A101JAT2A, Mount="Surface Mount,PCB", Packaging="Tape and Reel", Radiation Hardening=No, REACH SVHC="No SVHC", RoHS Compliant=Yes, Series=-, Termination=SMD/SMT, Thickness=0.022inch, Voltage Rating=50V, Voltage Rating (DC)=50V, Width=0.02inch
C29: library part CMP-001-00003-2, "CAP CER 10000PF 16V X7R 0402", Capacitance=10nF, Case Code (Imperial)=0402, Case Code (Metric)=1005, Dielectric=X7R, Insulation Resistance=10GR, Max Operating Temperature=125°C, Min Operating Temperature=-55°C, Package Quantity=1, Tolerance=10%, Voltage=16V, Case/Package=0402, Depth=0.5mm, Dissipation Factor=3.5%, Halogen Free="Halogen Free", Height=0.5mm, Lead Free="Lead Free", Length=1mm, Mfr. Part No.=CC0402KRX7R7BB103, Mount="Surface Mount", Number of Pins=2, Packaging="Tape and Reel", Radiation Hardening=No, REACH SVHC="No SVHC", RoHS Compliant=Yes, Series=CC, Termination=SMD/SMT, Thickness=0.022inch, Voltage Rating=16V, Voltage Rating (DC)=16V, Width=0.02inch
C34: library part CMP-001-00083-10, "CAP CER 2.2UF 10V X7R 0603", Capacitance=2.2uF, Case Code (Imperial)=0603, Case Code (Metric)=1608, Dielectric=X7R, Max Operating Temperature=125°C, Min Operating Temperature=-55°C, Package Quantity=4000, Tolerance=10%, Voltage=10V, Case/Package=0603, Depth=0.8mm, Height=0.8mm, Lead Free="Lead Free", Length=1.6mm, Material=Ceramic, Mount="Surface Mount", Number of Pins=2, Packaging="Cut Tape", REACH SVHC="No SVHC", RoHS Compliant=Yes, Series=GRM, Termination=Standard, Thickness=0.035inch, Voltage Rating=10V, Voltage Rating (DC)=10V, Weight=0.000222oz, Width=0.8mm
C37 C41: library part CMP-001-00090-11, "MURATA - GRM155R71C224KA12D - SMD Multilayer Ceramic Capacitor, 0.22 µF, 16 V, 0402 [1005 Metric], ± 10%, X7R, GRM Series", Capacitance=220nF, Case Code (Imperial)=0402, Case Code (Metric)=1005, Dielectric=X7R, Max Operating Temperature=125°C, Min Operating Temperature=-55°C, Package Quantity=1, Tolerance=10%, Voltage=16V, Case/Package=0402, Construction=Flat, Depth=0.5mm, Height=0.5mm, Lead Free="Lead Free", Length=1mm, Material=Ceramic, Mount="Surface Mount", Packaging="Tape and Reel", Radiation Hardening=No, REACH SVHC="No SVHC", RoHS Compliant=Yes, Series=GRM, Termination=SMD/SMT, Thickness=0.022inch, Voltage Rating=16V, Voltage Rating (DC)=16V, Width=0.02inch
C38 C39: library part CMP-001-00007-3, "Cap Ceramic 7pF 50V C0G 0.25pF SMD 0402 125C T/R", Capacitance=7pF, Case Code (Imperial)=0402, Case Code (Metric)=1005, Dielectric=C0G, Dielectric Material=Ceramic, Max Operating Temperature=125°C, Min Operating Temperature=-55°C, Package Quantity=10000, Temperature Coefficient=30ppm/°C, Voltage=50V, Case/Package=0402, Construction=Flat, Depth=0.5mm, Lead Free="Lead Free", Length=1mm, Mfr. Part No.=04025A7R0CAT2A, Mount="Surface Mount", Packaging="Tape and Reel", Radiation Hardening=No, REACH SVHC="No SVHC", Series=-, Termination=SMD/SMT, Thickness=0.022inch, Voltage Rating=50V, Voltage Rating (DC)=50V, Width=0.02inch
C48 C49 C53 C54: library part CMP-001-00096-2, "CAP CER 10UF 10V X5R 0805", Capacitance=10uF, Case Code (Imperial)=0805, Case Code (Metric)=2012, Dielectric=X5R, Dielectric Material=Ceramic, Max Operating Temperature=85°C, Min Operating Temperature=-55°C, Package Quantity=1, Tolerance=10%, Voltage=10V, Case/Package=0805, Construction=Flat, Contact Plating=Tin,Matte, Depth=1.25mm, Dissipation Factor=10%, Height=1.25mm, Length=2mm, Mount="Surface Mount", Number of Pins=2, Packaging="Tape and Reel", Radiation Hardening=No, REACH SVHC="No SVHC", RoHS Compliant=Yes, Series=C, Termination=SMD/SMT, Thickness=0.055inch, Voltage Rating=10V, Voltage Rating (DC)=10V, Width=1.2mm
C56: library part CMP-001-00009-2, "Cap Ceramic 0.8pF 50V C0G 0.1pF SMD 0402 125C Paper T/R", Capacitance=0.8pF, Case Code (Imperial)=0402, Case Code (Metric)=1005, Dielectric=C0G, Max Operating Temperature=125°C, Min Operating Temperature=-55°C, Package Quantity=1, Voltage=50V, Case/Package=0402, Construction=Flat, Depth=0.5mm, Height=0.5mm, Lead Free="Lead Free", Length=1mm, Mfr. Part No.=GJM1555C1HR80BB01D, Mount="Surface Mount", Packaging="Tape and Reel", Radiation Hardening=No, RoHS Compliant=Yes, Series=GJM, Termination=SMD/SMT, Thickness=0.022inch, Voltage Rating=50V, Voltage Rating (DC)=50V, Width=0.02inch
C57: library part CMP-001-00008-2, "Multilayer Ceramic Capacitors MLCC - SMD/SMT 0402 0.3pF 50Volts C0G +/-0.05pF", Capacitance=0.3pF, Case Code (Imperial)=0402, Case Code (Metric)=1005, Dielectric=C0G, Max Operating Temperature=125°C, Min Operating Temperature=-55°C, Package Quantity=10000, Voltage Rating=50V, Case/Package=0402, Construction=Flat, Depth=0.5mm, Height=0.5mm, Lead Free="Lead Free", Length=1mm, Mfr. Part No.=GJM1555C1HR30WB01D, Mount="Surface Mount", Packaging="Tape and Reel", Radiation Hardening=No, RoHS Compliant=Yes, Series=GJM, Termination=SMD/SMT, Thickness=0.022inch, Voltage Rating (DC)=50V, Width=0.02inch
C58 C59: library part CMP-001-00016-2, "CAPACITOR CERAMIC, 0.1UF, 50V, X7R, 10%, 0603", Capacitance=100nF, Case Code (Imperial)=0603, Case Code (Metric)=1608, Dielectric=X7R, Dielectric Material=Ceramic, Max Operating Temperature=125°C, Min Operating Temperature=-55°C, Package Quantity=1, Tolerance=10%, Voltage=50V, Case/Package=0603, Depth=0.8mm, Halogen Free="Halogen Free", Height=0.8mm, Lead Free="Lead Free", Length=1.6mm, Mfr. Part No.=CC0603KRX7R9BB104, Mount="Surface Mount", Number of Pins=2, Packaging="Tape and Reel", Radiation Hardening=No, REACH SVHC="No SVHC", RoHS Compliant=Yes, Series=CC, Termination=SMD/SMT, Thickness=0.035inch, Voltage Rating=50V, Width=0.031inch
C61 C62: library part CMP-001-00013-2, "Cap Ceramic 0.068uF 50V X7R 10% SMD 0603 125C Paper T/R", Capacitance=68nF, Case Code (Imperial)=0603, Case Code (Metric)=1608, Dielectric=X7R, Max Operating Temperature=125°C, Min Operating Temperature=-55°C, Package Quantity=4000, Tolerance=10%, Voltage=50V, Case/Package=0603, Construction=Flat, Contact Plating=Tin,Matte, Depth=0.81mm, Dissipation Factor=2.5%, Height=0.9mm, Lead Free="Lead Free", Length=1.6mm, Mfr. Part No.=06035C683KAT2A, Mount="Surface Mount", Number of Pins=2, Packaging="Tape and Reel", Radiation Hardening=No, REACH SVHC=Unknown, RoHS Compliant=Yes, Series=-, Termination=SMD/SMT, Thickness=0.035inch, Voltage Rating=50V, Voltage Rating (DC)=50V, Width=0.81mm
C63: library part CMP-001-00012-3, "AVX 47nF Multilayer Ceramic Capacitor (MLCC) 50 V dc -20  80% Y5V dielectric Standard Surface Mount", Capacitance=47nF, Case Code (Imperial)=0603, Case Code (Metric)=1608, Dielectric=Y5V, Dielectric Material=Ceramic, Max Operating Temperature=85°C, Min Operating Temperature=-30°C, Package Quantity=1, Tolerance=80%, Voltage=50V, Case/Package=0603, Construction=Flat, Depth=0.81mm, Height=0.9mm, Lead Free="Lead Free", Length=0.063inch, Mfr. Part No.=06035G473ZAT2A, Mount="Surface Mount", Number of Pins=2, Packaging="Tape and Reel", Radiation Hardening=No, REACH SVHC="No SVHC", RoHS Compliant=Yes, Series=-, Termination=SMD/SMT, Thickness=0.035inch, Voltage Rating=50V, Voltage Rating (DC)=50V, Width=0.032inch
C64: library part CMP-001-00011-2, "AVX - 06031C182JAT2A - SMD Multilayer Ceramic Capacitor, 1800 pF, 100 V, 0603 [1608 Metric], ± 5%, X7R, AVX 0603 MLCC", Capacitance=1.8nF, Case Code (Imperial)=0603, Case Code (Metric)=1608, Dielectric=X7R, Dielectric Material=Ceramic, Max Operating Temperature=125°C, Min Operating Temperature=-55°C, Package Quantity=1, Tolerance=5%, Voltage Rating=100V, Case/Package=0603, Construction=Flat, Contact Plating=Tin,Matte, Depth=0.81mm, Dissipation Factor=2.5%, Lead Free="Lead Free", Length=1.6mm, Mfr Part No.=06031C182JAT2A, Mount="Surface Mount", Packaging="Tape and Reel", Radiation Hardening=No, REACH SVHC="No SVHC", RoHS Compliant=Yes, Series=-, Termination=SMD/SMT, Thickness=0.035inch, Voltage Rating (DC)=100V, Width=0.81mm
C66 C67: library part CMP-001-00014-3, "TDK         CGA2B2C0G1H080D050BA             SMD Multilayer Ceramic Capacitor, 0402 [1005 Metric], 8 pF, 50 V,  0.5pF, C0G / NP0, CGA Series", Capacitance=8pF, Case Code (Imperial)=0402, Case Code (Metric)=1005, Dielectric=C0G, Max Operating Temperature=125°C, Min Operating Temperature=-55°C, Package Quantity=10000, Ratings=AEC-Q200, Resistor Type=Ceramic, Voltage Rating=50V, Case/Package=0402, Depth=0.5mm, Height=0.5mm, Length=1mm, Mfr. Part No.=CGA2B2C0G1H080D050BA, Mount="Surface Mount", Packaging="Tape and Reel", REACH SVHC="No SVHC", RoHS Compliant=Yes, Series=CGA, Termination=SMD/SMT, Thickness=0.022inch, Voltage Rating (DC)=50V, Weight=2.3E-05oz, Width=0.5mm
D1: library part CMP-004-00017-3, "Schottky Barrier Rectifier, 20 V, 1 A, -65 to 150 degC, 2-Pin DO-214AC (SMA), RoHS, Tape and Reel", Case/Package=SMA, Forward Current=1A, Forward Voltage=500mV, Manufacturer="Vishay Semiconductor", Max Operating Temperature=125°C, Max Surge Current=40A, Min Operating Temperature=-65°C, Package Description="2-Pin Surface Mount Device, Body 4.245 x 2.665 mm", Package Quantity=1800, Package Reference="DO-214AC (SMA)", Peak Reverse Current=6mA, Datasheet URL=http://www.vishay.com/docs/88746/ss12.pdf, Datasheet Version=Aug-15, Manufacturer URL=http://www.vishay.com/, Mounting Technology=SM, Packaging=TapeandReel, Pins=2, RoHS Compliant=True
DS1: library part CMP-007-00022-3, "LED Uni-Color Green, 100 mW, 30 mA, -55 to 85 degC, 2-Pin SMD, RoHS, Tape and Reel", Case/Package=0603, Colour=Green, Forward Current=20mA, Forward Voltage=2.1V, Manufacturer=Lite-On, Max Operating Temperature=85°C, Min Operating Temperature=-55°C, Package Description="2-Pin Surface Mount Device, Body 1.6 x 0.8 mm", Package Quantity=3000, Package Reference=C190GKT, Power=100mW, Datasheet URL=http://datasheet.octopart.com/LTST-C190GKT-Lite-On-datasheet-158530.pdf, Datasheet Version=Dec-06, Illumination Colour=Green, Lens Style=Clear, Luminous Intensity=6mcd, Manufacturer URL=http://www.us.liteon.com/, Mounting Technology=SM, Nominal Vf=2.1V, Packaging=TapeandReel, Pins=2, RoHS Compliant=True, Viewing Angle=130degrees
DS2 DS3: library part CMP-007-00025-3, "LED Uni-Color Yellow, 75 mW, 30 mA, -30 to 85 degC, 2-Pin SMD, RoHS, Tape and Reel", Case/Package=0603, Colour=Yellow, Forward Current=20mA, Forward Voltage=2V, Manufacturer=Lite-On, Max Operating Temperature=85°C, Min Operating Temperature=-55°C, Package Description="2-Pin Surface Mount Device, Body 1.6 x 0.8 mm", Package Quantity=3000, Package Reference=C190KSKT, Power=75mW, Datasheet URL=http://optoelectronics.liteon.com/upload/download/DS-22-99-0189/S_110_LTST-C190KSKT.pdf, Datasheet Version="Rev. I, 10/2012", Illumination Colour=Yellow, Lens Style=Diffused, Luminous Intensity=28mcd, Manufacturer URL=http://www.us.liteon.com/, Mounting Technology=SM, Nominal Vf=2.1V, Packaging=TapeandReel, Pins=2, RoHS Compliant=True, Viewing Angle=130degrees
FLT1: library part CMP-00004-1, "CHIP MULTILAYER LC FILTER", Case Code (Imperial)=0805, Case Code (Metric)=2012, Frequency=2.45GHz, Max Frequency=2.5GHz, Max Operating Temperature=85°C, Min Frequency=2.4GHz, Min Operating Temperature=-40°C, Package Quantity=1, Bandwidth=50MHz, Case/Package=0805, Impedance=50R, Insertion Loss=0.5dB, Lead Free="Lead Free", Length=2mm, Number of Pins=8, Packaging="Tape and Reel", Radiation Hardening=No, REACH SVHC="No SVHC", RoHS Compliant=Yes, Series=LFL, Shielding=Unshielded, Termination=SMD/SMT, Width=1.25mm
J1: library part CMP-002-00043-3, "Right Angle Receptacle Connector, Micro USB, 5 Position, Height 2.65 mm, -30 to 85 degC, RoHS, Tape and Reel", Current Rating=1A, Manufacturer="Hirose Electric", Max Operating Temperature=85°C, Min Operating Temperature=-30°C, Package Description="USB Connector, 5 Position Surface Mount, Length 8 mm, Height 2.65 mm", Package Quantity=2000, Case/Package=ZX62D-B-5P8, Connector Type=USB, Contact Material=Copper, Contact Plating=Gold, Datasheet URL=https://www.hirose.com/product/en/download_file/key_name/ZX62D-B-5P8/category/Catalog/doc_file_id/31704/?file_category_id=5&item_id=02420034000&is_series=, Datasheet Version=Aug-16, Gender=Male, Housing Material=Plastic, Lead Pitch=0.65mm, Manufacturer URL=https://www.hirose.com, Mounting Technology=SM, Package Reference=ZX62D-B-5P8, Package URL=https://www.hirose.com/product/en/download_file/key_name/ZX62D-B-5P8/category/Drawing%20(2D)/doc_file_id/36535/?file_category_id=6&item_id=02420034000&is_series=, Packaging=TapeandReel, Pins=5, RoHS Compliant=True, Rows=1
J2: library part CMP-002-00088-2, "CONN HEADER VERT 20POS 2.54MM", Color=Black, Contact Current Rating=1A, Flammability Rating="UL94 V-0", Insulation Resistance=5GR, Max Operating Temperature=105°C, Max Voltage Rating (AC)=250V, Min Operating Temperature=-65°C, Package Quantity=35, Board Standoff="No (Without)", Connector System=Wire-to-Board, Connector Type=Header, Contact Gender=Male, Contact Material="Copper Alloy", Contact Mating Length=0.24inch, Contact Plating=Gold,Tin, Contact Post Length=0.12inch, Contact Shape=Square, Contact Type="Male Pin", Current Rating=1A, Depth=9.14mm, Height=8.813mm, Housing Color=Black, Housing Material=PBT, Length=33.02mm, Mating Alignment="Yes (With)", Mating Connector Lock="No (Without)", Mating Retention="No (Without)", Mount="Through Hole", Number of Contacts=20, Number of Positions=20, Number of Rows=2, Orientation=Straight, Packaging=Rail/Tube, PCB Mount Alignment="No (Without)", PCB Mount Retention=Without, PCB Mounting Orientation=Vertical, Pins=20, Pitch=2.54mm, REACH SVHC="No SVHC", Row Spacing=2.54mm, Series=AMP-LATCH, Shrouded="Yes (With)", Shrouded End Dimension=3.81mm, Termination="Through Hole", Voltage Rating=250V
J3: library part CMP-002-00082-3, "CONN SMA JACK R/A 50 OHM PCB", Case/Package=SMA, Dielectric Material=PTFE, Frequency=18Hz, Housing Color=Gold, Max Frequency=18GHz, Max Operating Temperature=165°C, Min Operating Temperature=-65°C, Operating Frequency="0 to 18 GHz", Package Quantity=25, Voltage Rating=335V, Body Material=Brass, Body Plating=Gold, Center Contact Plating=Gold, Connector Type=SMA,Coaxial, Contact Material=Copper, Contact Plating=Gold, Fastening Type=Threaded, Impedance=50R, Length=19.69mm, Mount="Through Hole,Panel,Bulkhead", Orientation="Right Angle", Packaging=Bulk, Radiation Hardening=No, REACH SVHC="No SVHC", Series=SMA, Termination=Solder, Type=SMA
J4: library part CMP-002-00018-5, "Male Header, Pitch 2.54 mm, 2 x 3 Position, Height 8.13 mm, -65 to 125 degC, RoHS, Tube", Manufacturer="TE Connectivity", Max Operating Temperature=125°C, Min Operating Temperature=-65°C, Package Description="Male Header, Pitch 2.54 mm, 2 x 3 Position, Height 8.13 mm", Case/Package=5-146130-2, Connector Type=Header, Datasheet URL=http://www.te.com/commerce/DocumentDelivery/DDEController?Action=showdoc&DocId=Customer+Drawing%7F146130%7FM%7Fpdf%7FEnglish%7FENG_CD_146130_M.pdf%7F5-146130-2, Datasheet Version=Oct-15, Gender=Male, Manufacturer URL=http://www.te.com/, Mounting Technology=SM, Package Reference=5-146130-2, RoHS Compliant=Unknown
J5 J6: library part CMP-002-00089-2, "CONN HEADER VERT 1POS", Color=Black, Connector Type=Header, Contact Material=Copper, Contact Mating Length=0.236inch, Contact Plating=Gold, Gender=Male, Mfr. Part No.=61300111121, Mount="Through Hole", Number of Contacts=1, Number of Positions=1, Number of Rows=1, Packaging=Bulk, Pins=1, REACH SVHC=Unknown, Termination=Solder
L1: library part CMP-006-00033-3, "EPCOS   B82496C3100J   INDUCTOR, 0603 CASE, 10NH", Case Code (Imperial)=0603, Case Code (Metric)=1608, Current Rating=400mA, DC Current=600mA, DC Resistance (DCR)=200mR, Inductance=10nH, Inductance Tolerance=5%, Inductor Type=Wirewound, Max Operating Temperature=125°C, Package Quantity=4000, Ratings=AEC-Q200, Self Resonant Frequency=5GHz, Series Resistance=320mR, Test Frequency=100MHz, Case/Package=0603, Contact Plating=Tin, Core Material=Copper,Ceramic, Depth=0.9mm, Height=0.8mm, Height - Seated (Max)=0.035inch, Lead Free="Lead Free", Length=1.6mm, Max DC Current=600mA, Mfr. Part No.=B82496C3100J000, Military Standard=Not, Mount="Surface Mount", Number of Pins=2, Packaging="Tape and Reel", Q Factor=14, Radiation Hardening=No, REACH SVHC=Unknown, Resistor Type=Wirewound, RoHS Compliant=Yes, Series=B82496C, Shielding=Unshielded, Termination=SMD/SMT, Tolerance=5%, Weight=0.000141oz, Width=0.031inch
L2: library part CMP-006-00032-4, "Inductor Power Shielded Multi-Layer 2.2uH 20% 1MHz Ferrite 0.75A 0.3Ohm DCR 0603 T/R", Case/Package=0603, Current Rating=750mA, Max Operating Temperature=85°C, Min Operating Temperature=-40°C, Self Resonant Frequency=50MHz, Core Material=Ferrite, Mfr. Part No.=CVH160808-2R2M, RoHS Compliant=Yes, Shielding=Shielded
L3: library part CMP-006-00034-3, "2.2nH Unshielded Wirewound Inductor 1.5A 35 mOhm Max 0603 (1608 Metric)", Case Code (Imperial)=0603, Case Code (Metric)=1608, Current Rating=1.5A, DC Resistance (DCR)=35mR, Inductance=2.2nH, Max Operating Temperature=150°C, Min Operating Temperature=-55°C, Package Quantity=4000, Ratings=AEC-Q200, Resistor Type=Wirewound, Self Resonant Frequency=10GHz, Test Frequency=100MHz, Case/Package=0603, Core Material=Ceramic,Copper, DC Current=1.5A, Depth=0.9mm, Height=0.8mm, Height - Seated (Max)=0.035inch, Lead Free="Lead Free", Length=1.6mm, Max DC Current=1.5A, Mfr. Part No.=B82496C3229A, Military Standard=Not, Mount="Surface Mount", Number of Pins=2, Packaging="Tape and Reel", Q Factor=14, RoHS Compliant=Yes, Series=SIMID, Shielding=Unshielded, Termination=SMD/SMT, Weight=0.000141oz, Width=0.031inch